# Altium PCB PCB.PcbDoc
Units mil, origin at the board's own origin, x right, y up, seen from the top; angles counter-clockwise.
Board outline 6000 x 4000 mil, 2 copper layers (Top Layer, Bottom Layer); 8 components, 14 nets, 100 pads, 0 vias.
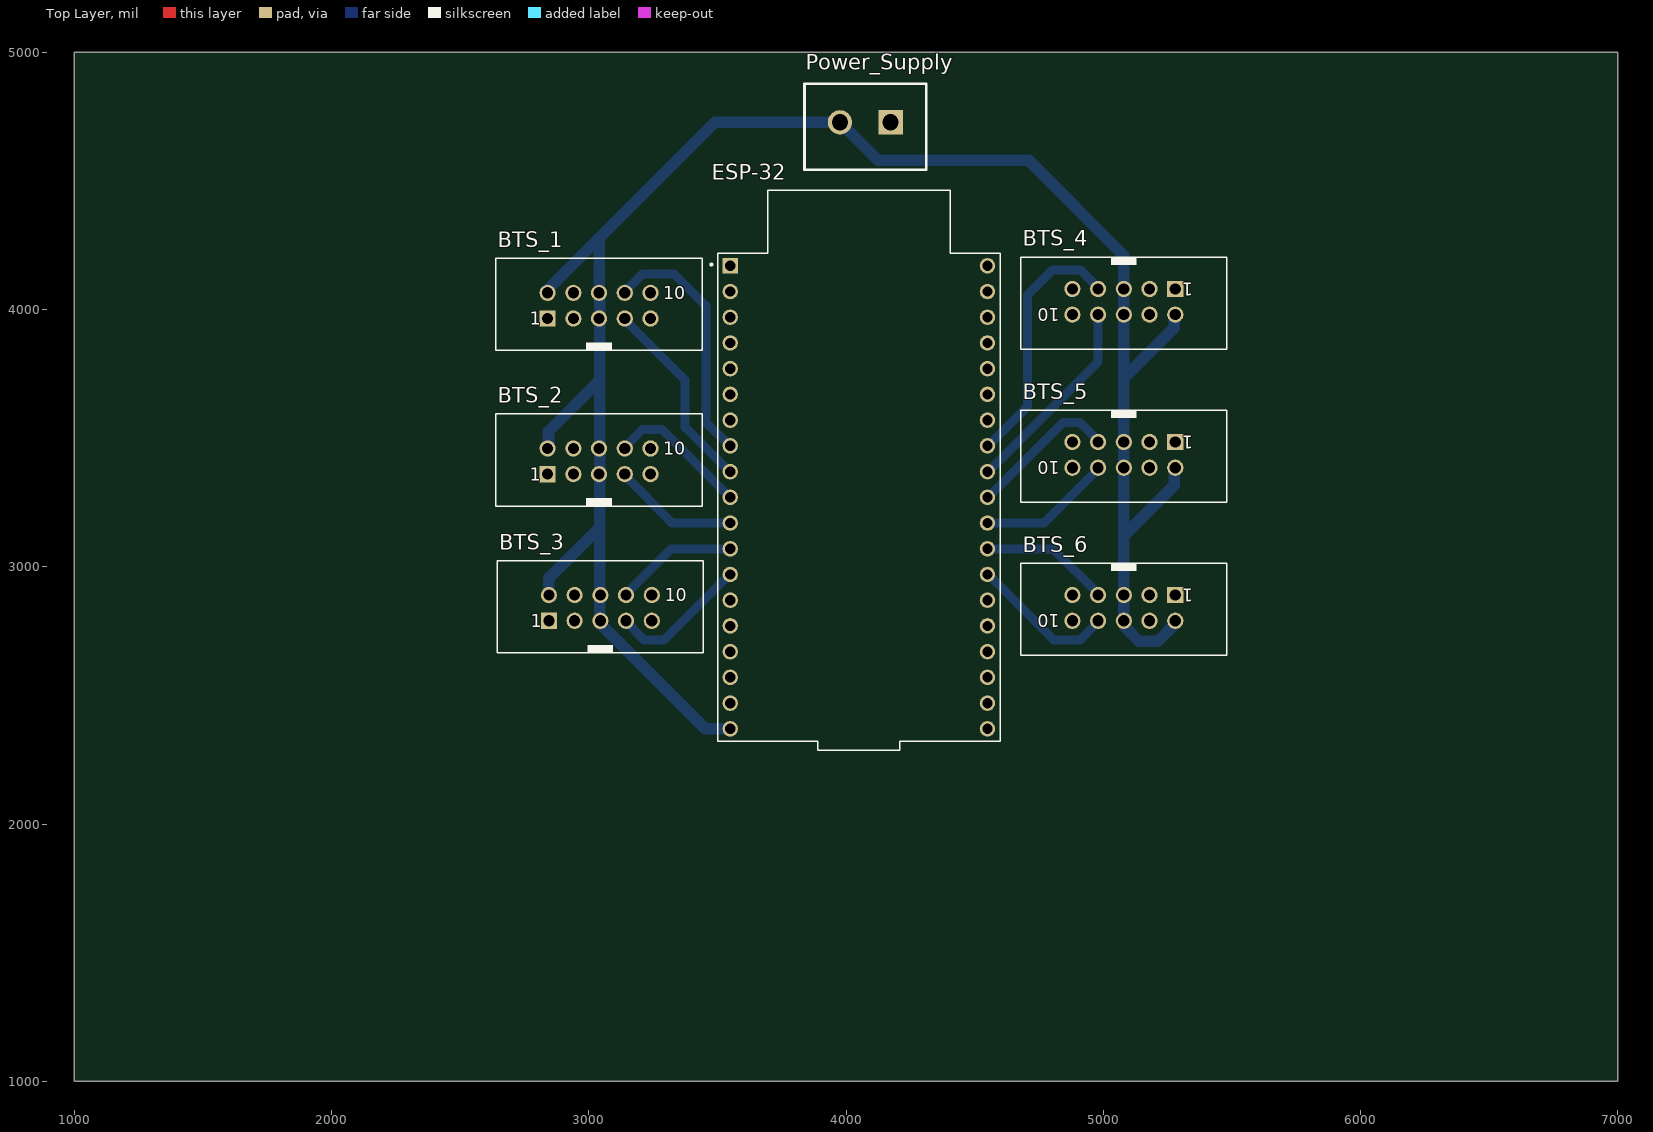
[diagram p0: Top Layer view]
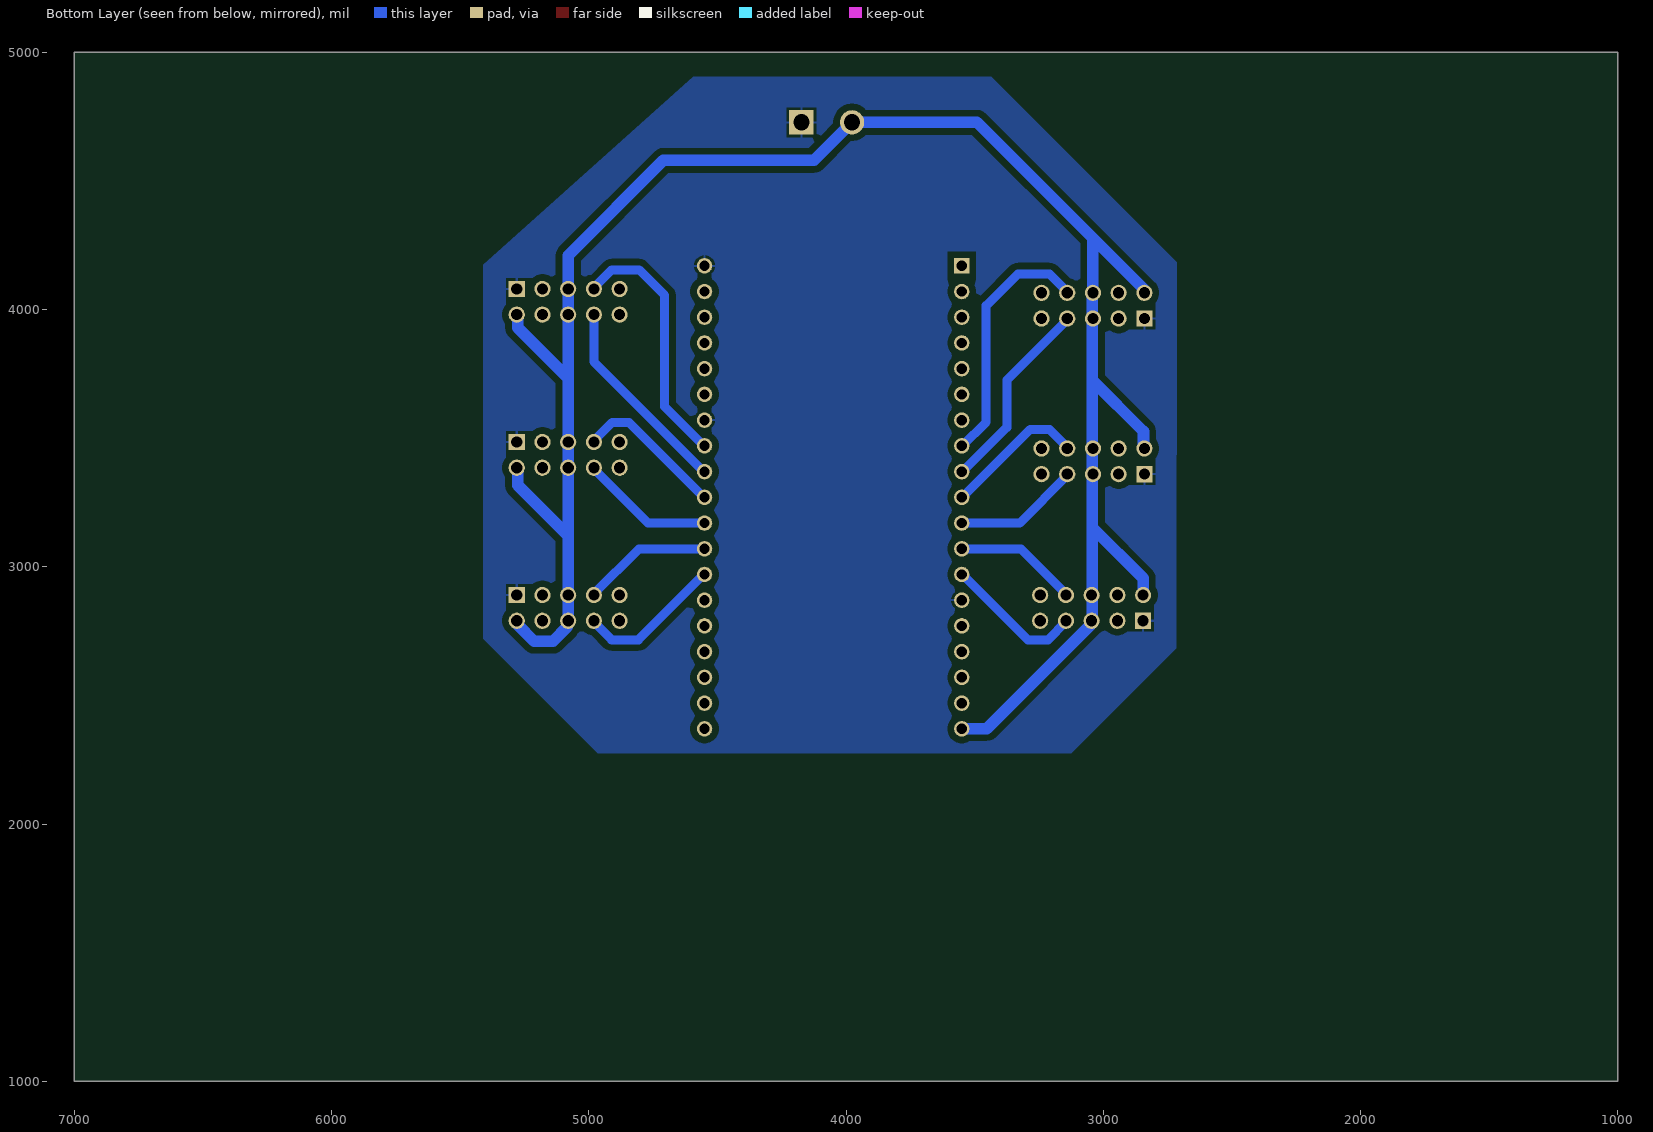
[diagram p1: Bottom Layer view, seen from below]
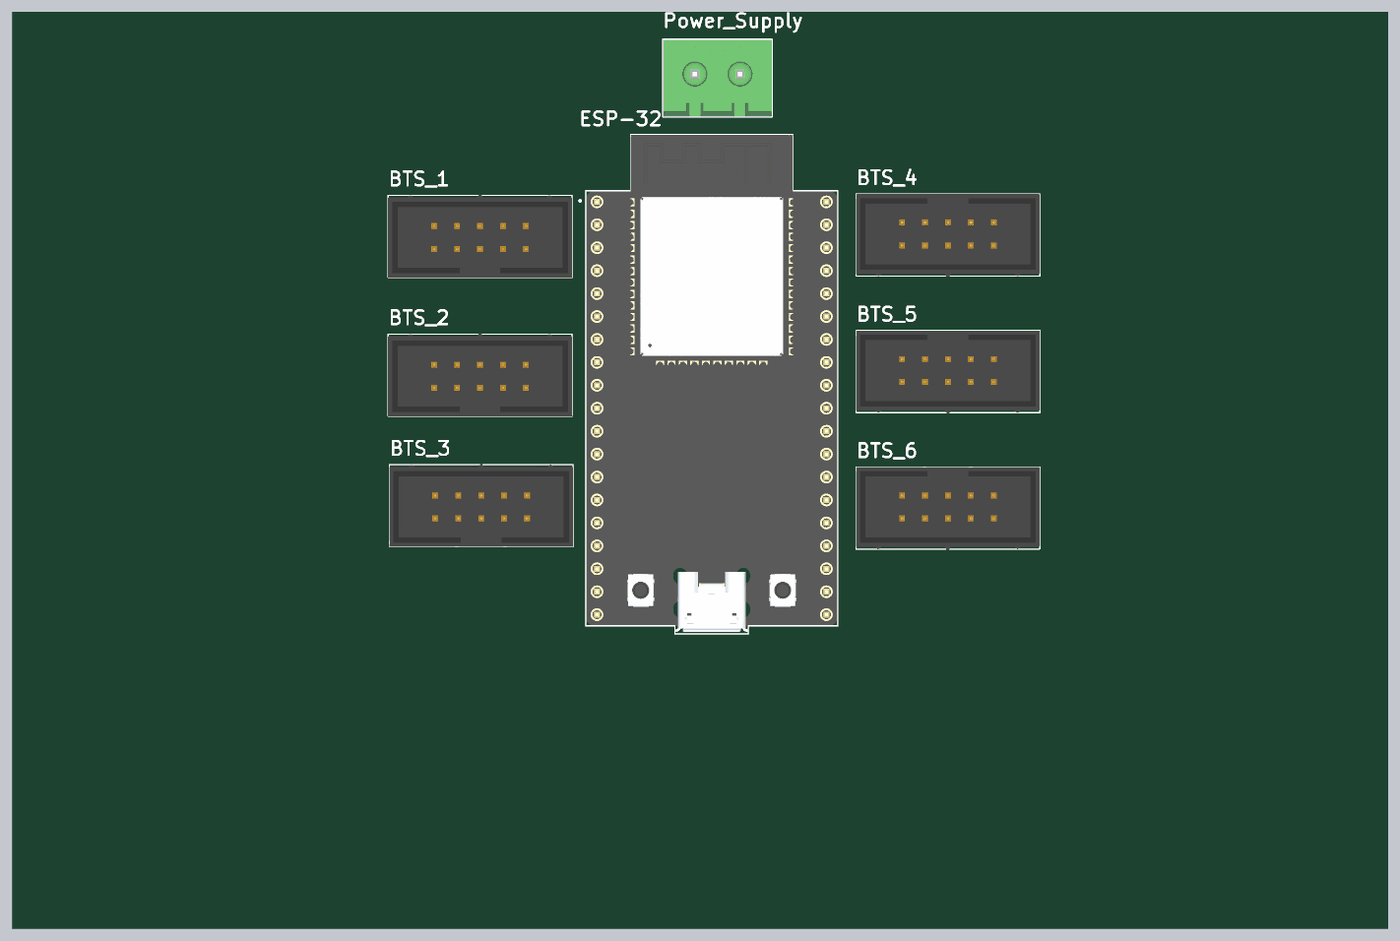
[diagram p2: 3D render of the assembled board from above, using the file's embedded part models]

## Layer stack, top to bottom
Top Solder: solder mask 0.4, Solder Resist, Dk 3.5
Top Layer: signal copper 1.4
Dielectric 1: dielectric 12.6, FR-4, Dk 4.8
Bottom Layer: signal copper 1.4
Bottom Solder: solder mask 0.4, Solder Resist, Dk 3.5

## Board outline
1000,1000 7000,1000 7000,5000 1000,5000

## Design rules (kind name [scope] priority, off if disabled: settings)
Clearance [All] p1: gap=25 ignorepadtopadclearanceinfootprint=FALSE
PolygonConnect [All] p1: connectstyle=Relief reliefconductorwidth=10 reliefentries=4 polygonreliefangle="90 Angle" airgapwidth=10
RoutingVias [All] p1: holewidth=28 width=50 viastyle="Through Hole" minholewidth=28 minwidth=50 maxholewidth=28 maxwidth=50
SolderMaskExpansion [All] p1: expansion=4 istentingtop=FALSE
SupplyNets "Schematic Supply Nets_1" [InNet('GND')] p1: voltage=0.000
SupplyNets "Schematic Supply Nets" [InNet('5V')] p2: voltage=0.000
Width [All] p1: maxlimit=45 minlimit=20 preferedwidth=35 minimp=50.000000 maximp=50.000000 favimp=50.000000
30 further rules are at their usual default settings.

## Components (designator, comment, footprint, x,y, rotation, side; value= is the part's Value field where it differs from the comment)
BTS_1 "61201021621" 61201021621 3040,4015 r0 top
BTS_2 "61201021621" 61201021621 3040,3410 r0 top
BTS_3 "61201021621" 61201021621 3045,2840 r0 top
BTS_4 "61201021621" 61201021621 5080,4030 r180 top
BTS_5 "61201021621" 61201021621 5080,3435 r180 top
BTS_6 "61201021621" 61201021621 5080,2840 r180 top
ESP-32 "ESP32-DEVKITC" MODULE_ESP32-DEVKITC 4050,3270.39 r0 top
Power_Supply "691311700102" 691311700102 4075,4710 r180 top

## Footprints (in the part's own frame and the unit in brackets; to place one, negate y for a bottom-side part, rotate by r counter-clockwise, add the part's x,y. Pads: shape width x height; smd on the part's side, far side on the other; paste and mask are expansions set on the pad)
61201021621 [mm] "10 pins, straight, gold plating"
  rect 1.6x1.6 hole 1.1: 1(-5.08,-1.27)
  round 1.6 hole 1.1: 2(-5.08,1.27) 3(-2.54,-1.27) 4(-2.54,1.27) 5(0,-1.27) 6(0,1.27) 7(2.54,-1.27) 8(2.54,1.27) 9(5.08,-1.27) 10(5.08,1.27)
  silkscreen extent -10.18,-4.42 10.18,4.68, body extent -10.18,-4.42 10.18,4.75, height 9.13
691311700102 [mm] "5.00mm - PCB Vertical Closed - 02p"
  rect 2.4x2.4 hole 1.6: 1(-2.5,-0.45)
  round 2.4 hole 1.6: 2(2.5,-0.45)
  silkscreen extent -6,-4.25 6,4.25, body extent -6,-4.25 6,4.25, height 12.1
MODULE_ESP32-DEVKITC [mm]
  rect 1.53x1.53 / inner round 1.53 / far side rect 1.53x1.53 hole 1.02: 1(-12.7,22.85)
  round 1.53 hole 1.02: 2(-12.7,20.31) 3(-12.7,17.77) 4(-12.7,15.23) 5(-12.7,12.69) 6(-12.7,10.15) 7(-12.7,7.61) 8(-12.7,5.07) 9(-12.7,2.53) 10(-12.7,-0.01) 11(-12.7,-2.55) 12(-12.7,-5.09) 13(-12.7,-7.63) 14(-12.7,-10.17) 15(-12.7,-12.71) 16(-12.7,-15.25) 17(-12.7,-17.79) 18(-12.7,-20.33) 19(-12.7,-22.87) 20(12.7,-22.87) 21(12.7,-20.33) 22(12.7,-17.79) 23(12.7,-15.25) 24(12.7,-12.71) 25(12.7,-10.17) 26(12.7,-7.63) 27(12.7,-5.09) 28(12.7,-2.55) 29(12.7,-0.01) 30(12.7,2.53) 31(12.7,5.07) 32(12.7,7.61) 33(12.7,10.15) 34(12.7,12.69) 35(12.7,15.23) 36(12.7,17.77) 37(12.7,20.31) 38(12.7,22.85)
  silkscreen extent -14.67,-25 13.95,30.3, body extent -13.97,-24.8 13.97,30.3, height 3.25

## Part data
BTS_1 BTS_2 BTS_3 BTS_4 BTS_5 BTS_6: "WR-BHD 2.54mm Male Box Header", Manufacturer="Wurth Elektronik", ComponentLink1 Description=Manufacturer, ComponentLink1URL=http://www.we-online.com, ComponentLink2 Description=Datasheet, ComponentLink2URL=http://katalog.we-online.de/em/datasheet/6120xx21621.pdf, Created by="Baojun Chen", Created Date="March 2016", NoPins=10, partNo=61201021621
ESP-32: "ESP32-WROOM-32UE series Transceiver; 802.11 b/g/n (Wi-Fi, WiFi, WLAN), Bluetooth Â® Smart Ready 4.x Dual Mode Evaluation Board", Package=None, Availability="In Stock", Check_prices=https://www.snapeda.com/parts/ESP32-DEVKITC/Espressif+Systems/view-part/?ref=eda, MF="Espressif Systems", MP=ESP32-DEVKITC, Price=None, Purchase-URL=https://pricing.snapeda.com/search/part/ESP32-DEVKITC/?ref=eda, SnapEDA_Link=https://www.snapeda.com/parts/ESP32-DEVKITC/Espressif+Systems/view-part/?ref=snap
Power_Supply: "WR-TBL Serie 3117 - 5.00 mm Close Vertical PCB Header, 02p", ComponentLink1Description=Manufacturer, ComponentLink1URL=http://www.we-online.de, ComponentLink2Description=Datasheet, ComponentLink2URL=http://katalog.we-online.de/em/datasheet/6913117001xx.pdf, Part Number=691311700102, Pin Number=02p, Pitch="5 mm", Published Date="Jan 2017", Publisher="Wurth Elektronik"

## Nets (pads, with @x,y where several pads share a name; then routed paths per layer and width w, separated by ;. In a path a pad name is that pad's centre, name@x,y a point inside that pad or via, vN(x,y) a via of type N, cw(c..) or ccw(c..) an arc to the next point about the centre after c; other vN are vias at no path point)
5V: BTS_1.2 BTS_1.5 BTS_1.6 BTS_2.2 BTS_2.5 BTS_2.6 BTS_3.2 BTS_3.5 BTS_3.6 BTS_4.2 BTS_4.5 BTS_4.6 BTS_5.2 BTS_5.5 BTS_5.6 BTS_6.2 BTS_6.5 BTS_6.6 ESP-32.19 Power_Supply.2 | length 7986
  Bottom Layer w45: BTS_2.2 2843.44,3463.44 2843.44,3525.94 3042.5,3725 ; BTS_1.2 2843.44,4068.44 2843.44,4080.16 3040,4276.72 ; BTS_3.2 2845,2955 3042.5,3152.5 ; ESP-32.19 3549.1,2370.9 3452.38,2370.9 3048.44,2774.84 3048.44,2786.56 3042.5,2792.5 3042.5,2890 3042.5,3152.5 ; Power_Supply.2@3971.86,4727.72 3491,4727.72 3040,4276.72 ; Power_Supply.2 4124.29,4580 4710,4580 5080,4210 BTS_4.5 BTS_4.6 5080,3732.5 ; BTS_6.6@5080,2785.13 BTS_6.5 5080,3120 ; BTS_6.6 5083.44,2786.56 5083.44,2766.56 5139,2711 5212.72,2711 5276.56,2774.84 5276.56,2786.56 BTS_6.2 ; BTS_5.2 5276.56,3381.56 5276.56,3316.56 5080,3120 ; BTS_4.2 5276.56,3976.56 5276.56,3929.06 5080,3732.5 ; 3040,4276.72 BTS_1.6 3042.5,4062.5 3042.5,3725 ; 3042.5,3152.5 3042.5,3360 3042.5,3460 3042.5,3725 ; 5080,3120 BTS_5.6 BTS_5.5 5080,3732.5
GND: BTS_1.1 BTS_2.1 BTS_3.1 BTS_4.1 BTS_5.1 BTS_6.1 ESP-32.14 ESP-32.32 ESP-32.38 Power_Supply.1
LPWM_1: BTS_1.7 ESP-32.9 | length 766.4
  Bottom Layer w35: BTS_1.7 3140,3960.35 3375,3725.35 3375,3542.3 3547.3,3370 ESP-32.9
LPWM_2: BTS_2.7 ESP-32.11 | length 491.4
  Bottom Layer w35: BTS_2.7 3140,3355.35 3325.35,3170 ESP-32.11
LPWM_3: BTS_3.7 ESP-32.13 | length 543.6
  Bottom Layer w35: BTS_3.7 3145,2785.35 3214.35,2716 3293.31,2716 3547.3,2970 ESP-32.13
LPWM_4: BTS_4.7 ESP-32.31 | length 1000.2
  Bottom Layer w35: ESP-32.31 4552.7,3470 4705,3622.3 4705,4055 4804,4154 4910.65,4154 4980,4084.65 BTS_4.7
LPWM_5: BTS_5.7 ESP-32.29 | length 585.3
  Bottom Layer w35: ESP-32.29 4552.7,3270 4844.35,3561.65 4907.99,3561.65 4980,3489.65 BTS_5.7
LPWM_6: BTS_6.7 ESP-32.27 | length 507.3
  Bottom Layer w35: ESP-32.27 4804.65,3070 4980,2894.65 BTS_6.7
RPWM_1: BTS_1.8 ESP-32.8 | length 985.7
  Bottom Layer w35: BTS_1.8 3140,4069.65 3209.35,4139 3331,4139 3455,4015 3455,3562.3 3547.3,3470 ESP-32.8
RPWM_2: BTS_2.8 ESP-32.10 | length 552.7
  Bottom Layer w35: BTS_2.8 3140,3464.65 3209.35,3534 3283.31,3534 3547.3,3270 ESP-32.10
RPWM_3: BTS_3.8 ESP-32.12 | length 482.3
  Bottom Layer w35: BTS_3.8 3145,2894.65 3320.35,3070 ESP-32.12
RPWM_4: BTS_4.8 ESP-32.30 | length 789.7
  Bottom Layer w35: ESP-32.30 4552.7,3370 4980,3797.3 BTS_4.8
RPWM_5: BTS_5.8 ESP-32.28 | length 521.8
  Bottom Layer w35: ESP-32.28 4769.65,3170 4980,3380.35 BTS_5.8
RPWM_6: BTS_6.8 ESP-32.26 | length 568.6
  Bottom Layer w35: ESP-32.26 4552.7,2970 4806.69,2716 4910.65,2716 4980,2785.35 BTS_6.8
pads on no net: BTS_1.3 BTS_1.4 BTS_1.9 BTS_1.10 BTS_2.3 BTS_2.4 BTS_2.9 BTS_2.10 BTS_3.3 BTS_3.4 BTS_3.9 BTS_3.10 BTS_4.3 BTS_4.4 BTS_4.9 BTS_4.10 BTS_5.3 BTS_5.4 BTS_5.9 BTS_5.10 BTS_6.3 BTS_6.4 BTS_6.9 BTS_6.10 ESP-32.1 ESP-32.2 ESP-32.3 ESP-32.4 ESP-32.5 ESP-32.6 ESP-32.7 ESP-32.15 ESP-32.16 ESP-32.17 ESP-32.18 ESP-32.20 ESP-32.21 ESP-32.22 ESP-32.23 ESP-32.24 ESP-32.25 ESP-32.33 ESP-32.34 ESP-32.35 ESP-32.36 ESP-32.37

## Polygon pours and split planes (outlines as drawn)
GND on Bottom Layer "GND_L02_P000" (solid, remove dead copper, pour order 0): 2713.26,4183.26 3435,4905 4593.16,4905 5410,4174.28 5410,2720 4965,2275 3125,2275 2716.74,2683.26

## Text inside footprints (layer, text, board x,y; h text height)
BTS_1: Top Overlay "10" at 3290,4040 h50; Top Overlay "1" at 2770,3940 h50
BTS_2: Top Overlay "10" at 3290,3435 h50; Top Overlay "1" at 2770,3335 h50
BTS_3: Top Overlay "10" at 3295,2865 h50; Top Overlay "1" at 2775,2765 h50
BTS_4: Top Overlay "10" at 4830,4005 h50 r180; Top Overlay "1" at 5350,4105 h50 r180
BTS_5: Top Overlay "10" at 4830,3410 h50 r180; Top Overlay "1" at 5350,3510 h50 r180
BTS_6: Top Overlay "10" at 4830,2815 h50 r180; Top Overlay "1" at 5350,2915 h50 r180